# Altium PCB PCB1.PcbDoc
Units mm, origin at the board's own origin, x right, y up, seen from the top; angles counter-clockwise.
Board outline 146.68 x 134.47 mm, 2 copper layers (Top Layer, Bottom Layer); 96 components, 78 nets, 282 pads, 85 vias.
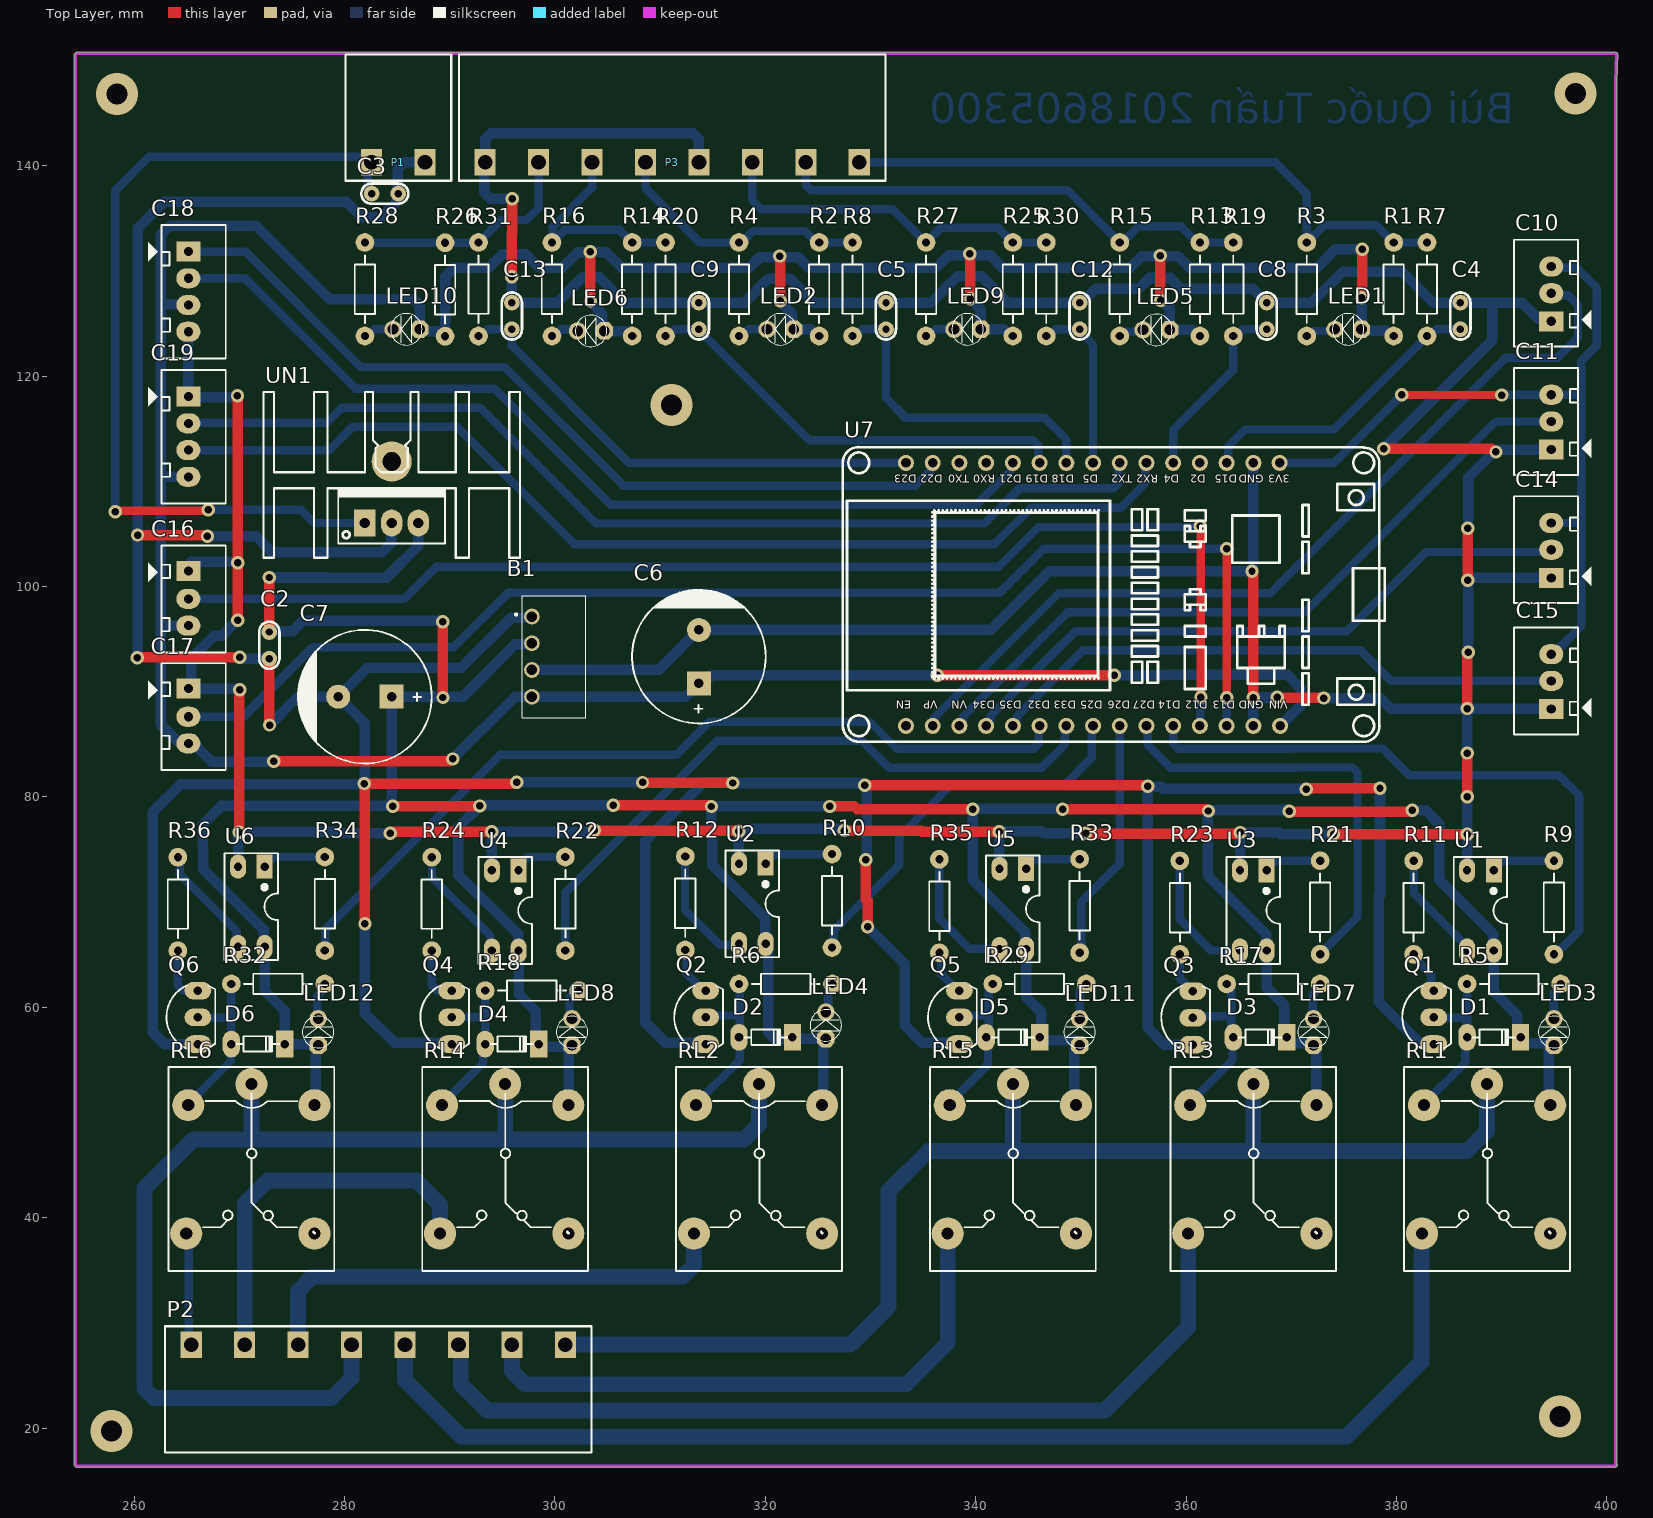
[diagram p0: Top Layer view]
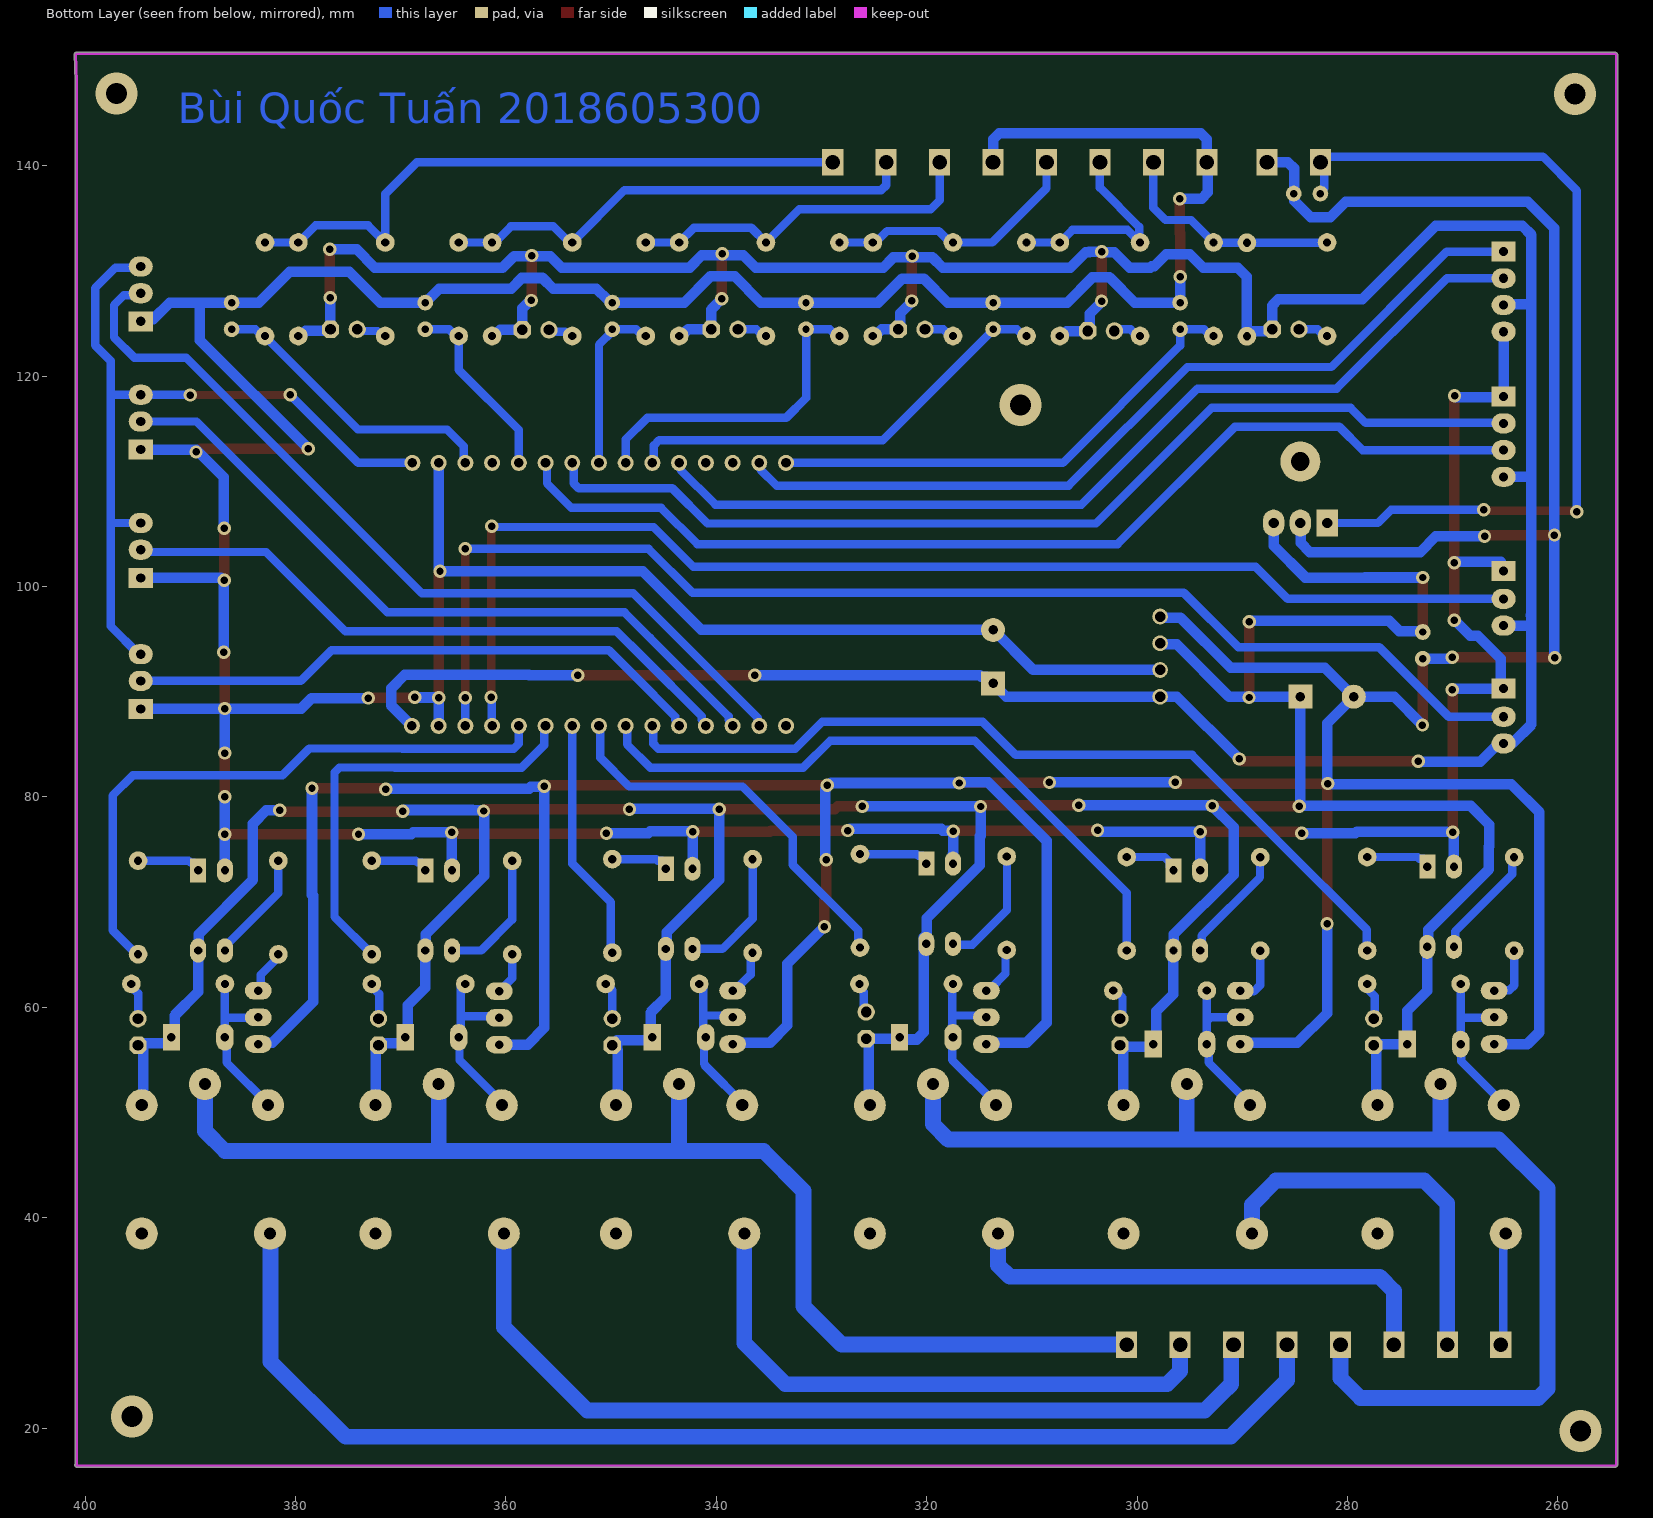
[diagram p1: Bottom Layer view, seen from below]

## Layer stack, top to bottom
Top Solder: solder mask 0.0102, Solder Resist, Dk 3.5
Top Layer: signal copper 0.0356
Dielectric 1: dielectric 0.32, FR-4, Dk 4.8
Bottom Layer: signal copper 0.0356
Bottom Solder: solder mask 0.0102, Solder Resist, Dk 3.5

## Board outline
254.368,16.394 254.418,16.344 ccw(c254.508,16.433) 254.508,16.306 400.812,16.306 ccw(c400.812,16.434) 400.903,16.344 400.953,16.395 ccw(c400.863,16.485) 400.99,16.485 ccw(c400.863,16.485) 400.939,16.586 400.939,35.103 400.939,148.004 401.014,150.644 ccw(c400.884,150.645) 400.886,150.775 254.508,150.775 ccw(c254.508,150.647) 254.417,150.737 254.367,150.687 ccw(c254.456,150.597) 254.33,150.597 254.33,16.485 ccw(c254.457,16.485)

## Design rules (kind name [scope] priority, off if disabled: settings)
Clearance [All] p1: gap=1 ignorepadtopadclearanceinfootprint=FALSE
PolygonConnect [All] p1: connectstyle=Relief reliefconductorwidth=0.254 reliefentries=4 polygonreliefangle="90 Angle" airgapwidth=0.254
RoutingVias [All] p1: holewidth=0.711 width=1.27 viastyle="Through Hole" minholewidth=0.711 minwidth=1.27 maxholewidth=0.711 maxwidth=1.27
SolderMaskExpansion [All] p1: expansion=0.102 istentingtop=FALSE
Width GND_ISO [InNet('GND_ISO')] p1: maxlimit=1 minlimit=1 preferedwidth=1
Width COM_O_1 [InNet('COM_O_1')] p2: maxlimit=1.5 minlimit=1.5 preferedwidth=1.5
Width COM_O_2 [InNet('COM_O_2')] p3: maxlimit=1.5 minlimit=1.5 preferedwidth=1.5
Width VCC_ISO [InNet('VCC5_ISO')] p4: maxlimit=1 minlimit=1 preferedwidth=1
Width GND [InNet('GND')] p5: maxlimit=1 minlimit=1 preferedwidth=1
Width VCC [InNet('VCC5')] p6: maxlimit=1 minlimit=1 preferedwidth=1
Width SIGNAL [All] p7: maxlimit=0.8 minlimit=0.8 preferedwidth=0.8
30 further rules are at their usual default settings.

## Components (designator, comment, footprint, x,y, rotation, side; value= is the part's Value field where it differs from the comment)
B1 "B0505S1W" B0505S1W 297.815,97.155 r270 top
C2 "104" "tu gom" 272.847,94.412 r270 top
C3 "104" "tu gom" 283.845,137.363 r0 top
C4 "104" "tu gom" 386.08,125.73 r90 top
C5 "104" "tu gom" 331.47,125.73 r90 top
C6 "Cap Pol3" CP2/5 313.69,90.805 r90 top value=C?
C7 "Cap Pol3" CP2/5 284.48,89.535 r180 top value=C?
C8 "104" "tu gom" 367.665,125.73 r90 top
C9 "104" "tu gom" 313.69,125.73 r90 top
C10 "ADC1" Header3 394.716,125.349 r90 top
C11 "ADC2" Header3 394.716,113.157 r90 top
C12 "104" "tu gom" 349.885,125.73 r90 top
C13 "104" "tu gom" 295.91,125.73 r90 top
C14 "ADC3" Header3 394.716,100.965 r90 top
C15 "ADC4" Header3 394.716,88.494 r90 top
C16 "1_WIRE_1" Header3 265.151,101.371 r270 top
C17 "1_WIRE_2" Header3 265.151,90.17 r270 top
C18 "LCD_I2C" Header4 265.151,131.851 r270 top
C19 "UART2" Header4 265.151,118.059 r270 top
D1 "100v" "DIODE 0.5A" 389.255,57.15 r180 top
D2 "100v" "DIODE 0.5A" 320.04,57.15 r180 top
D3 "100v" "DIODE 0.5A" 367.03,57.15 r180 top
D4 "100v" "DIODE 0.5A" 295.91,56.515 r180 top
D5 "100v" "DIODE 0.5A" 343.535,57.15 r180 top
D6 "100v" "DIODE 0.5A" 271.78,56.515 r180 top
LED1 "LED 3mm" LED-3MM-BLUE 375.285,124.46 r180 top
LED2 "LED 3mm" LED-3MM-BLUE 321.31,124.46 r180 top
LED3 "LED 3mm" LED-3MM-BLUE 394.97,57.785 r90 top
LED4 "LED 3mm" LED-3MM-BLUE 325.755,58.42 r90 top
LED5 "LED 3mm" LED-3MM-BLUE 357.048,124.409 r180 top
LED6 "LED 3mm" LED-3MM-BLUE 303.301,124.308 r180 top
LED7 "LED 3mm" LED-3MM-BLUE 372.11,57.785 r90 top
LED8 "LED 3mm" LED-3MM-BLUE 301.625,57.785 r90 top
LED9 "LED 3mm" LED-3MM-BLUE 339.09,124.46 r180 top
LED10 "LED 3mm" LED-3MM-BLUE 285.75,124.46 r180 top
LED11 "LED 3mm" LED-3MM-BLUE 349.885,57.785 r90 top
LED12 "LED 3mm" LED-3MM-BLUE 277.495,57.785 r90 top
P1 "BIG_Header 2" "BIG_Header 2" 282.575,140.335 r0 top
P2 "BIG Heager 8" "BIG_Header 8" 300.99,27.94 r180 top
P3 "BIG Heager 8" "BIG_Header 8" 293.37,140.335 r0 top
Q1 "C1815" C1815_cam 383.54,59.055 r90 top
Q2 "C1815" C1815_cam 314.325,59.055 r90 top
Q3 "C1815" C1815_cam 360.629,59.004 r90 top
Q4 "C1815" C1815_cam 290.195,59.055 r90 top
Q5 "C1815" C1815_cam 338.455,59.055 r90 top
Q6 "C1815" C1815_cam 266.065,59.055 r90 top
R1 "10K" R1/4W 379.73,132.715 r270 top value="R1/4W - 1K"
R2 "10K" R1/4W 325.12,132.715 r270 top value="R1/4W - 1K"
R3 "220R" R1/4W 371.475,132.715 r270 top value="R1/4W - 1K"
R4 "220R" R1/4W 317.5,132.715 r270 top value="R1/4W - 1K"
R5 "510R" R1/4W 395.605,62.23 r180 top value="R1/4W - 1K"
R6 "510R" R1/4W 326.39,62.23 r180 top value="R1/4W - 1K"
R7 "1K" R1/4W 382.905,123.825 r90 top value="R1/4W - 1K"
R8 "1K" R1/4W 328.295,123.825 r90 top value="R1/4W - 1K"
R9 "100R" R1/4W 394.97,65.055 r90 top value="R1/4W - 1K"
R10 "100R" R1/4W 326.339,65.687 r90 top value="R1/4W - 1K"
R11 "510R" R1/4W 381.635,73.929 r270 top value="R1/4W - 1K"
R12 "510R" R1/4W 312.395,74.346 r270 top value="R1/4W - 1K"
R13 "10K" R1/4W 361.315,132.715 r270 top value="R1/4W - 1K"
R14 "10K" R1/4W 307.34,132.715 r270 top value="R1/4W - 1K"
R15 "220R" R1/4W 353.695,132.715 r270 top value="R1/4W - 1K"
R16 "220R" R1/4W 299.72,132.715 r270 top value="R1/4W - 1K"
R17 "510R" R1/4W 372.745,62.23 r180 top value="R1/4W - 1K"
R18 "510R" R1/4W 302.26,61.595 r180 top value="R1/4W - 1K"
R19 "1K" R1/4W 364.49,123.825 r90 top value="R1/4W - 1K"
R20 "1K" R1/4W 310.515,123.825 r90 top value="R1/4W - 1K"
R21 "100R" R1/4W 372.745,65.055 r90 top value="R1/4W - 1K"
R22 "100R" R1/4W 300.99,65.405 r90 top value="R1/4W - 1K"
R23 "510R" R1/4W 359.41,73.929 r270 top value="R1/4W - 1K"
R24 "510R" R1/4W 288.29,74.28 r270 top value="R1/4W - 1K"
R25 "10K" R1/4W 343.535,132.715 r270 top value="R1/4W - 1K"
R26 "10K" R1/4W 289.56,132.691 r270 top value="R1/4W - 1K"
R27 "220R" R1/4W 335.28,132.715 r270 top value="R1/4W - 1K"
R28 "220R" R1/4W 281.94,132.715 r270 top value="R1/4W - 1K"
R29 "510R" R1/4W 350.52,62.23 r180 top value="R1/4W - 1K"
R30 "1K" R1/4W 346.71,123.825 r90 top value="R1/4W - 1K"
R31 "1K" R1/4W 292.735,123.825 r90 top value="R1/4W - 1K"
R32 "510R" R1/4W 278.13,62.23 r180 top value="R1/4W - 1K"
R33 "100R" R1/4W 349.885,65.205 r90 top value="R1/4W - 1K"
R34 "100R" R1/4W 278.13,65.405 r90 top value="R1/4W - 1K"
R35 "510R" R1/4W 336.55,74.079 r270 top value="R1/4W - 1K"
R36 "510R" R1/4W 264.16,74.28 r270 top value="R1/4W - 1K"
RL1 "Relay" RELAY_SRA_05VDC_SL_C 388.62,52.705 r270 top
RL2 "Relay" RELAY_SRA_05VDC_SL_C 319.405,52.705 r270 top
RL3 "Relay" RELAY_SRA_05VDC_SL_C 366.395,52.705 r270 top
RL4 "Relay" RELAY_SRA_05VDC_SL_C 295.275,52.705 r270 top
RL5 "Relay" RELAY_SRA_05VDC_SL_C 343.535,52.705 r270 top
RL6 "Relay" RELAY_SRA_05VDC_SL_C 271.145,52.705 r270 top
U1 "PC817" DIP4/W0.3 389.255,73.028 r180 top
U2 "PC817" DIP4/W0.3 320.04,73.66 r180 top
U3 "PC817" DIP4/W0.3 367.665,73.028 r180 top
U4 "PC817" DIP4/W0.3 296.545,73.025 r180 top
U5 "PC817" DIP4/W0.3 344.805,73.178 r180 top
U6 "PC817" DIP4/W0.3 272.415,73.378 r180 top
U7 "ESP32_MODULE copy" ESP32-WIFIMODULE-FOOTPRINT 352.889,101.388 r90 top
UN1 "L78M05CP" QTO-220H2 284.48,106.045 r0 top

## Footprints (in the part's own frame and the unit in brackets; to place one, negate y for a bottom-side part, rotate by r counter-clockwise, add the part's x,y. Pads: shape width x height; smd on the part's side, far side on the other; paste and mask are expansions set on the pad)
B0505S1W [mm]
  round 1.5 hole 1: 1(0,0) 2(2.54,0) 3(5.08,0) 4(7.62,0)
  silkscreen extent -1.99,-1.6 9.61,5.1, body extent -1.99,-0.9 9.61,5.1, height 10.1
"BIG_Header 2" [mm]
  rect 2x2.5 hole 1.4: 1(0,0) 2(5.08,0)
  silkscreen extent -2.5,-1.75 7.57,10.25, body extent -2.5,-1.75 7.58,10.25, height 3.15
"BIG_Header 8" [mm]
  rect 2x2.5 hole 1.4: 1(0,0) 2(5.08,0) 3(10.16,0) 4(15.24,0) 5(20.32,0) 6(25.4,0) 7(30.48,0) 8(35.56,0)
  silkscreen extent -2.5,-1.75 38.06,10.25, body extent -2.5,-1.75 38.06,10.25, height 3.15
C1815_cam [mil]
  oval 66x100 hole 32: 1(-100,0) 2(0,0) 3(100,0)
  silkscreen extent -117,-65 120,118, body extent -109,-66 109,95, height 245
CP2/5 [mil]
  rect 90x90 hole 35: 1(0,0)
  round 90 hole 35: 2(200,0)
  silkscreen extent -150,-250 350,250, body extent -142,-246 350,246, height 984
"DIODE 0.5A" [mil] "Diode muoi, xung"
  oval 65x100 hole 32: 1(100,0)
  rect 65x100 hole 32: 2(-100,0)
  silkscreen extent -80,-30 80,28, body extent -108,-33 108,32, height 61
DIP4/W0.3 [mil]
  rect 60x90 hole 31: 1(0,0)
  oval 60x90 hole 31: 2(100,0) 3(100,300) 4(0,300)
  silkscreen extent -50,-50 150,350, body extent -59,-10 159,305, height 170
ESP32-WIFIMODULE-FOOTPRINT [mil]
  round 60 hole 36: 1(-575.9,768.25) 2(-575.9,668.25) 3(-575.9,568.25) 4(-575.9,468.25) 5(-575.9,368.25) 6(-575.9,268.25) 7(-575.9,168.25) 8(-575.9,68.25) 9(-575.9,-31.75) 10(-575.9,-131.75) 11(-575.9,-231.75) 12(-575.9,-331.75) 13(-575.9,-431.75) 14(-575.9,-531.75) 15(-575.9,-631.75) 16(408.35,-630.18) 17(408.35,-531.75) 18(408.35,-431.75) 19(408.35,-331.75) 20(408.35,-231.75) 21(408.35,-131.75) 22(408.35,-31.75) 23(408.35,68.25) 24(408.35,168.25) 25(408.35,268.25) 26(408.35,368.25) 27(408.35,468.25) 28(408.35,568.25) 29(408.35,668.25) 30(408.35,768.25)
  silkscreen extent -635,-1023 468,1005
Header3 [mil] "CON 3"
  rect 75x90 hole 34: 1(-5,0)
  oval 75x90 hole 34: 2(100,0) 3(200,0)
  silkscreen extent -100,-150 300,140, body extent -95,-90 295,136, height 276
Header4 [mil] "CON4"
  rect 75x90 hole 34: 1(0,0)
  oval 75x90 hole 34: 2(100,0) 3(200,0) 4(300,0)
  silkscreen extent -100,-150 400,140, body extent -90,-90 398,136, height 276
LED-3MM-BLUE [mil]
  oct 65x65 hole 40: 1(-55,0)
  round 65 hole 40: 2(45,0)
  silkscreen extent -64,-59 54,59, body extent -72,-65 54,65, height 184
QTO-220H2 [mil] "TO-220 - 1-2-3"
  round 150 hole 70: 0(0,230)
  rect 80x100 hole 39: 1(-100,0)
  oval 80x100 hole 39: 2(0,0) 3(100,0)
  silkscreen extent -480,-130 480,490, body extent -449,-177 453,469, height 1206
R1/4W [mil]
  round 70 hole 31: 1(0,0) 2(350,0)
  silkscreen extent 48,-38 302,38, body extent -40,-47 386,47, height 111
RELAY_SRA_05VDC_SL_C [mil] "Relay SPDT, 5 pin, 10A,W 650mil, L 800mil, H 800mil"
  round 120 hole 45: 1(559.06,-243.78) 2(559.06,236.22) 3(78.74,236.22) 4(0,0) 5(78.74,-236.22)
  silkscreen extent -63,-311 700,310, body extent -55,-306 697,304, height 602
"tu gom" [mm] "Tu gom mini"
  round 1.5 hole 0.7: 1(-1.27,0) 2(1.27,0)
  silkscreen extent -2.25,-0.97 2.22,0.97, body extent -2.92,-0.85 2.92,0.85, height 6.12

## Part data
B1: "Power Supply", Manufacturer_Name=Mornsun, Manufacturer_Part_Number=B0505S-1W, Datasheet Link=https://www.mornsun-power.com/uploads/pdf/B_D-1W.pdf, Height=10.41mm
C2 C3 C4 C5 C8 C9 C12 C13: library part "Tu gom 104 50V", "Cắm", Chung_Loai=Cắm, Don_Vi=Con, Ma_Hang=MH004761, So_Chan=2, Ten_Linh_Kien="Tụ gốm 104 100nF 50V"
C6 C7: "Polarized Capacitor (Surface Mount)", LatestRevisionDate=17-Jul-2002, LatestRevisionNote="Re-released for DXP Platform.", PackageReference=C0805, Publisher="Altium Limited"
C10 C11 C14 C15 C16 C17: library part Header3, "Header IDC, 3 x 1 Pin Vertical 2.54mm Pitch (Non-Boxed, Male)", Manufacturer="W¨¹rth Elektronik eiSos GmbH", partNo=613002143121, ComponentLink1 Description=Manufacturer, ComponentLink1URL=http://www.we-online.com, ComponentLink2 Description=Datasheet, ComponentLink2URL=http://katalog.we-online.de/em/datasheet/6130xx143121.pdf, Created by="Karrer Zheng", Created Date="29 March 2013", NoPins=02
C18 C19: library part Header4, "Header IDC, 4 x 1 Pin Vertical 2.54mm Pitch (Non-Boxed, Male)", Manufacturer="W¨¹rth Elektronik eiSos GmbH", partNo=613002143121, ComponentLink1 Description=Manufacturer, ComponentLink1URL=http://www.we-online.com, ComponentLink2 Description=Datasheet, ComponentLink2URL=http://katalog.we-online.de/em/datasheet/6130xx143121.pdf, Created by="Karrer Zheng", Created Date="29 March 2013", NoPins=02
D1 D2 D3 D4 D5 D6: library part "Diode 1N4148", "Cắm", Chung_Loai=Cắm, Don_Vi=Con, Ma_Hang=MH001065, Ten_Linh_Kien="Diode 1N4148 DO35 450mA 100V ( 1N4148 DIP)"
LED1 LED2 LED3 LED4 LED5 LED6 LED7 LED8 LED9 LED10 LED11 LED12: library part "LED 3mm Xanh Duong", "Cắm", Chung_Loai=Cắm, Don_Vi=Con, Ma_Hang=MH009003, Ten_Linh_Kien="LED 3MM Xanh Dương SS (1000c)"
P2 P3: library part "BIG_Header 8"
Q1 Q2 Q3 Q4 Q5 Q6: "NPN 600mW, ECB"
R1 R2 R3 R4 R5 R6 R7 R8 R9 R10 R11 R12 R13 R14 R15 R16 R17 R18 R19 R20 R21 R22 R23 R24 R25 R26 R27 R28 R29 R30 R31 R32 R33 R34 R35 R36: library part R1/4W, "Resistor 1/4W"
RL1 RL2 RL3 RL4 RL5 RL6: library part RL_SRA-05VDC-SL-C, "Relay 5 Chan", Ma_Hang=MH009374, Ten="Relay 5V10A SRD-05VDC-SL-C Chính Hãng"
U1 U2 U3 U4 U5 U6: "Single Opto"
UN1: "Positive Voltage Regulator", ComponentLink1Description="Manufacturer Link", ComponentLink1URL=http://www.st.com/, ComponentLink2Description=Datasheet, ComponentLink2URL=http://www.st.com/stonline/products/literature/ds/2146/l78m05c.pdf, DatasheetVersion=Apr-1994, LatestRevisionDate=17-Jul-2002, LatestRevisionNote="Re-released for DXP Platform.", Note="Tab is connected to pin 3 (GND).", PackageDescription="TO, Thru-Hole, Vertical, Heatsink Mounted; 3 In-Line Leads; Pitch 2.54 mm; Pin sequence 1, 3, 2", PackageReference=ISOWATT220AB, PackageVersion=Jul-1998, Published=24-Aug-2001, Publisher="Altium Limited"

## Via types
v1: diameter 1.27, hole 0.711, Top Layer to Bottom Layer, 80 vias
v2: diameter 4, hole 2, Top Layer to Bottom Layer, 5 vias

## Nets (pads, with @x,y where several pads share a name; then routed paths per layer and width w, separated by ;. In a path a pad name is that pad's centre, name@x,y a point inside that pad or via, vN(x,y) a via of type N, cw(c..) or ccw(c..) an arc to the next point about the centre after c; other vN are vias at no path point)
1_WIRE_1: C17.2 U7.13 | length 122
  Top Layer w0.8: U7.13 U7.13@363.918,86.823 ; v1(363.855,89.433) v1(363.855,103.608)
  Bottom Layer w0.8: C17.2@265.43,87.63 270.376,87.63 276.98,94.234 290.378,94.234 295.56,99.416 342.262,99.416 346.431,103.585 361.603,103.585 361.627,103.608 v1(363.855,103.608) ; U7.13 v1(363.855,89.433)
1_WIRE_2: C16.2 U7.12 | length 118.2
  Top Layer w0.8: U7.12 U7.12@361.378,86.823 ; v1(361.34,105.74) 361.378,105.702 361.378,89.522 v1(361.417,89.484)
  Bottom Layer w0.8: C16.2 285.674,98.831 288.722,101.879 342.18,101.879 345.965,105.664 361.264,105.664 v1(361.34,105.74) ; U7.12 361.366,86.811 361.366,89.433 v1(361.417,89.484)
ADC1_0: C10.2 U7.2 | length 83.1
  Bottom Layer w0.8: U7.2 336.054,86.899 336.054,87.515 347.89,99.351 367.981,99.351 390.398,121.768 395.337,121.768 397.259,123.69 397.259,126.754 396.336,127.678 394.927,127.678 C10.2
ADC1_3: C11.2 U7.3 | length 68.6
  Bottom Layer w0.8: U7.3 338.455,86.956 338.833,87.334 338.833,87.667 346.296,95.13 348.717,97.551 371.267,97.551 389.413,115.697 C11.2
ADC1_6: C14.2 U7.4 | length 61
  Bottom Layer w0.8: U7.4 340.995,86.956 341.373,87.334 341.373,87.661 347.042,93.33 349.463,95.751 375.253,95.751 382.795,103.294 394.505,103.294 C14.2
ADC1_7: C15.2 U7.5 | length 55.8
  Bottom Layer w0.8: U7.5 343.535,86.956 343.913,87.334 343.913,87.656 347.787,91.53 350.208,93.951 376.584,93.951 379.501,91.034 C15.2@394.843,91.034
COM_O_1: P2.1 RL1.4 RL3.4 RL5.4 | length 119.6
  Bottom Layer w1.5: P2.1 328.066,27.94 331.724,31.598 331.724,42.57 335.509,46.355 343.535,46.355 ; RL5.4 343.535,46.355 ; RL3.4 366.395,46.355 ; RL1.4 388.62,48.26 386.715,46.355 366.395,46.355 ; 343.535,46.355 366.395,46.355
COM_O_2: P2.5 RL2.4 RL4.4 RL6.4 | length 118.4
  Bottom Layer w1.5: RL6.4 271.145,47.431 ; P2.5 280.67,24.765 278.765,22.86 261.864,22.86 260.985,23.739 260.985,42.799 265.617,47.431 271.145,47.431 ; RL4.4 295.275,47.431 ; RL2.4 319.405,48.895 317.941,47.431 295.275,47.431 ; 271.145,47.431 295.275,47.431
GND: B1.1 C2.2 C3.2 C7.2 P1.2 Q1.1 Q2.1 Q3.1 Q4.1 Q5.1 Q6.1 UN1.2 | length 452.6
  Top Layer w1: v1(260.299,93.243) 260.325,93.269 270.027,93.269 v1(270.053,93.294) ; v1(260.325,104.902) 266.771,104.902 266.898,104.775 v1(266.971,104.775) ; C2.2 272.847,86.868 v1(272.872,86.843) ; v1(281.94,67.945) 281.914,67.971 281.914,81.254 v1(281.888,81.28) 296.212,81.28 296.316,81.385 v1(296.389,81.385) ; v1(308.331,81.382) 308.356,81.356 316.89,81.356 v1(316.916,81.331) ; v1(329.463,81.128) 356.179,81.128 356.281,81.026 v1(356.354,81.026) ; v1(329.565,74.041) 329.565,70.297 329.721,70.14 v1(329.721,67.662) ; v1(371.422,80.744) 371.474,80.795 371.665,80.795 371.718,80.848 v1(378.435,80.848)
  Bottom Layer w1: v1(260.299,93.243) 260.325,93.269 v1(260.325,104.902) 260.325,134.071 262.855,136.601 280.151,136.601 281.639,135.113 283.507,135.113 285.075,136.681 285.075,139.749 285.661,140.335 P1.2 ; Q6.1 262.89,56.515 261.747,57.658 261.747,78.562 264.414,81.229 281.838,81.229 v1(281.888,81.28) ; v1(266.971,104.775) 271.596,104.775 273.096,103.275 283.577,103.275 284.456,104.154 284.456,106.021 UN1.2 ; v1(270.053,93.294) 270.126,93.294 270.278,93.142 C2.2 ; v1(272.872,86.843) 275.565,89.535 C7.2 ; v1@281.837,81.28 281.915,81.358 281.915,87.02 C7.2 ; v1(281.94,67.945) 281.94,59.461 284.757,56.644 290.066,56.644 Q4.1 ; v1(296.389,81.385) v1(296.389,81.385) 308.329,81.383 v1(308.331,81.382) ; B1.1 297.719,97.059 295.891,97.059 291.109,92.278 282.143,92.278 C7.2 ; Q2.1 314.196,56.644 310.513,56.644 308.61,58.547 308.61,75.841 314.15,81.382 316.865,81.382 v1(316.916,81.331) v1@329.065,81.331 ; v1(329.565,74.041) 329.565,74.114 329.651,74.2 v1@329.651,80.745 ; v1(329.721,67.662) 333.248,64.135 333.248,58.293 334.897,56.644 338.326,56.644 Q5.1 ; Q3.1 357.937,56.464 356.354,58.047 v1(356.354,81.026) 356.406,80.974 357.635,80.974 357.805,80.804 363.969,80.804 363.996,80.777 371.389,80.777 v1(371.422,80.744) ; v1(378.435,80.848) 378.435,70.7 378.333,70.599 378.333,60.523 382.212,56.644 383.541,56.644 Q1.1@383.576,56.609
GND_ISO: B1.3 C4.2 C5.2 C6.2 C8.2 C9.2 C10.1 C11.1 C12.2 C13.2 C14.1 C15.1 C16.1 C17.1 C18.4 C19.1 P3.1 P3.5 U1.2 U2.2 U3.2 U4.2 U5.2 U6.2 U7.14 U7.17 | length 555.8
  Top Layer w1: v1(269.824,118.135) 269.838,118.121 v1(269.838,102.26) 269.844,102.255 269.844,96.802 v1(269.85,96.796) ; v1(270.002,76.637) 270.015,76.65 270.015,90.183 v1(270.027,90.195) ; v1(284.353,76.556) 284.426,76.556 284.578,76.708 v1(294.005,76.708) ; v1(295.913,129.47) 295.913,133.582 295.935,133.604 v1(295.935,136.884) ; v1(303.757,76.834) 303.807,76.784 317.463,76.784 v1(317.489,76.759) ; v1(327.516,76.81) 334.801,76.81 334.928,76.683 v1(342.24,76.683) ; v1(350.444,76.556) 350.493,76.507 364.96,76.507 365.081,76.628 v1(365.154,76.628) ; v1(366.268,101.475) 366.268,101.402 366.395,101.275 v1(366.395,89.432) ; v1(368.684,89.484) 368.722,89.446 373.037,89.446 v1(373.075,89.408) ; v1(374.015,76.454) v1(386.715,76.454) ; v1(378.79,113.115) 389.072,113.115 389.385,112.801 v1(389.458,112.801) ; v1(386.715,88.409) 386.715,93.602 386.817,93.704 v1(386.817,93.777) ; v1(386.74,80.029) v1(386.74,84.176) ; v1(386.791,100.609) v1(386.791,105.562)
  Bottom Layer w1: C18.4 C19.1 265.189,118.021 269.637,118.021 269.751,118.135 v1(269.824,118.135) ; C16.1@265.43,102.362 269.664,102.362 269.765,102.26 v1(269.838,102.26) ; v1(269.85,96.796) 269.792,96.796 268.311,95.316 267.604,95.316 265.43,93.142 265.43,90.297 269.926,90.297 v1(270.027,90.195) ; U6.2@269.875,73.66 269.875,76.437 270.002,76.564 v1(270.002,76.637) ; v1@270.601,76.708 279.096,76.708 279.248,76.556 v1(284.353,76.556) ; U4.2 v1(294.005,76.708) 303.559,76.708 303.684,76.834 v1(303.757,76.834) ; v1(295.913,129.47) 295.91,129.467 C13.2 300.212,127 302.625,129.413 304.241,129.413 306.654,127 C9.2 317.992,127 320.279,129.287 322.341,129.287 324.628,127 C5.2 335.772,127 338.263,129.491 340.552,129.491 343.043,127 C12.2 350.02,127 C12.2@350.116,127.096 ; v1(295.935,136.884) 293.854,136.884 293.268,137.469 293.268,140.233 P3.1 293.37,142.518 293.956,143.104 313.104,143.104 313.69,142.518 P3.5 ; B1.3 309.88,92.075 C6.2 341.418,95.885 347.006,101.473 366.266,101.473 v1(366.268,101.475) 366.268,101.548 366.395,101.675 U7.17 ; U2.2@317.5,74.562 317.489,74.573 v1(317.489,76.759) 317.541,76.81 318.472,76.81 318.628,76.966 327.287,76.966 327.442,76.81 v1(327.516,76.81) ; U5.2 342.252,73.19 342.252,76.67 v1(342.24,76.683) 342.289,76.732 346.28,76.732 346.456,76.556 v1(350.444,76.556) ; C12.2@350.338,127.25 351.414,128.326 355.513,128.326 356.524,129.337 358.486,129.337 359.497,128.326 366.339,128.326 C8.2 371.967,127 374.887,129.92 380.57,129.92 383.489,127 C4.2 389.103,127 ; U3.2 365.14,73.042 365.14,76.613 v1(365.154,76.628) 368.819,76.628 368.993,76.454 v1(374.015,76.454) ; U7.14 v1(366.395,89.432) 366.421,89.458 368.658,89.458 v1(368.684,89.484) ; v1(373.075,89.408) 378.44,89.408 379.439,88.409 v1(386.715,88.409) ; v1(378.79,113.115) 378.79,113.126 389.103,123.439 389.103,127 ; U1.2@386.715,73.66 v1(386.715,76.454) 386.728,76.467 386.728,80.017 v1(386.74,80.029) ; v1(386.74,84.176) 386.715,84.201 v1(386.715,88.409) ; v1(386.791,105.562) 386.817,105.588 386.817,110.414 v1@389.331,112.928 ; v1(386.817,93.777) 386.804,93.789 386.804,100.597 v1(386.791,100.609) 386.864,100.609 387.093,100.838 C14.1 ; v1@389.458,113.03 C11.1 ; C15.1 394.695,88.388 386.736,88.388 v1(386.715,88.409) ; C10.1 394.502,125.436 393.51,125.436 391.946,127 389.103,127
IN_1: C4.1 R7.1 U7.18 | length 28.4
  Bottom Layer w0.8: U7.18 363.994,111.899 363.994,113.335 365.594,114.935 374.077,114.935 382.905,123.763 R7.1 383.17,123.825 383.805,124.46 C4.1
IN_2: C8.1 R19.1 U7.20 | length 17.9
  Bottom Layer w0.8: U7.20 358.775,114.901 364.49,120.616 R19.1 364.755,123.825 365.39,124.46 C8.1
IN_3: C12.1 R30.1 U7.23 | length 16.7
  Bottom Layer w0.8: R30.1 346.975,123.825 347.61,124.46 C12.1 349.885,124.271 351.155,123.001 U7.23
IN_4: C5.1 R8.1 U7.24 | length 31
  Bottom Layer w0.8: R8.1 328.56,123.825 329.195,124.46 C5.1 331.47,117.932 333.35,116.053 346.558,116.053 348.615,113.995 U7.24
IN_5: C9.1 R20.1 U7.25 | length 42
  Bottom Layer w0.8: R20.1 310.78,123.825 311.415,124.46 C9.1 313.69,124.398 324.194,113.894 332.451,113.894 332.479,113.922 345.439,113.922 345.936,113.425 345.936,111.899 U7.25
IN_6: C13.1 R31.1 U7.30 | length 47.1
  Bottom Layer w0.8: R31.1 293,123.825 293.635,124.46 C13.1 295.91,122.911 307.061,111.76 U7.30
NetC3_1: C3.1 P1.1 UN1.1 | length 83.9
  Top Layer w0.8: v1(258.19,107.113) 258.278,107.201 266.959,107.201 v1(267.048,107.29)
  Bottom Layer w0.8: v1(258.19,107.113) 258.19,137.634 261.427,140.872 282.225,140.872 282.225,137.885 282.575,137.535 C3.1 ; v1(267.048,107.29) 275.866,107.29 277.111,106.045 UN1.1
NetD1_1: D1.1 Q1.2 R5.2 RL1.5 | length 16.6
  Bottom Layer w0.8: RL1.5@382.479,50.534 382.479,50.699 386.552,54.772 D1.1@386.552,57.15 ; Q1.2 383.565,59.03 386.715,59.03 ; D1.1 386.715,59.03 ; R5.2 386.715,59.03
NetD2_1: D2.1 Q2.2 R6.2 RL2.5 | length 16.4
  Bottom Layer w0.8: RL2.5@313.509,50.754 313.509,50.944 317.576,55.011 317.576,59.411 ; Q2.2@314.39,59.225 317.39,59.225 317.576,59.411 ; R6.2@317.576,62.205 317.576,59.411
NetD3_1: D3.1 Q3.2 R17.2 RL3.5 | length 17.2
  Bottom Layer w0.8: RL3.5@359.963,50.398 359.963,50.534 364.414,54.984 364.414,57.04 364.286,57.169 364.286,59.106 ; Q3.2@361.06,59.149 364.243,59.149 364.286,59.106 ; R17.2@364.157,62.362 364.286,62.233 364.286,59.106
NetD4_1: D4.1 Q4.2 R18.2 RL4.5 | length 16
  Bottom Layer w0.8: RL4.5@289.077,50.534 289.077,50.643 293.207,54.772 293.207,56.602 D4.1@293.116,56.693 ; Q4.2 293.13,59.055 293.13,58.928 ; D4.1 R18.2
NetD5_1: D5.1 Q5.2 R29.2 RL5.5 | length 16.6
  Bottom Layer w0.8: RL5.5@337.236,50.5 337.236,50.635 341.097,54.496 341.097,54.588 341.173,54.664 341.173,57.117 341.249,57.193 341.249,59.284 ; Q5.2@338.333,59.225 341.19,59.225 341.249,59.284 ; R29.2@341.325,62.463 341.249,62.387 341.249,59.284
NetD6_1: D6.1 Q6.2 R32.2 RL6.5 | length 16.3
  Bottom Layer w0.8: RL6.5@265.107,50.802 269.175,54.871 269.175,56.45 D6.1 269.24,59.03 ; Q6.2 266.09,59.03 269.24,59.03 ; R32.2 269.24,59.03
NetLED1_2: LED1.2 R3.2 | length 2.9
  Bottom Layer w0.8: R3.2 371.74,123.825 372.212,124.297 373.979,124.297 LED1.2
NetLED2_2: LED2.2 R4.2 | length 2.9
  Bottom Layer w0.8: R4.2 317.765,123.825 318.4,124.46 LED2.2
NetLED3_2: LED3.2 R5.1 | length 3.6
  Bottom Layer w0.8: LED3.2 394.97,61.33 395.605,61.965 R5.1
NetLED4_2: LED4.2 R6.1 | length 3
  Bottom Layer w0.8: LED4.2@325.822,59.487 325.985,59.65 325.985,61.459 326.466,61.94 R6.1@326.466,62.205
NetLED5_2: LED5.2 R15.2 | length 2.5
  Bottom Layer w0.8: R15.2 353.96,123.825 354.381,124.246 355.742,124.246 LED5.2
NetLED6_2: LED6.2 R16.2 | length 2.7
  Bottom Layer w0.8: R16.2 299.985,123.825 300.62,124.46 LED6.2@302.157,124.46
NetLED7_2: LED7.2 R17.1 | length 3.6
  Bottom Layer w0.8: LED7.2 372.059,58.979 372.059,61.28 372.745,61.965 R17.1
NetLED8_2: LED8.2 R18.1 | length 3.3
  Bottom Layer w0.8: LED8.2@301.39,58.788 301.39,60.94 302.034,61.584 R18.1@302.034,61.849
NetLED9_2: LED9.2 R27.2 | length 2.9
  Bottom Layer w0.8: R27.2 335.545,123.825 336.18,124.46 LED9.2
NetLED10_2: LED10.2 R28.2 | length 2.9
  Bottom Layer w0.8: R28.2 282.205,123.825 282.84,124.46 LED10.2
NetLED11_2: LED11.2 R29.1 | length 3.5
  Bottom Layer w0.8: LED11.2 349.885,61.633 350.333,62.081 R29.1@350.215,62.199
NetLED12_2: LED12.2 R32.1 | length 3.3
  Bottom Layer w0.8: LED12.2@277.42,58.915 277.42,61.067 278.064,61.711 R32.1@278.064,61.976
NetQ1_3: Q1.3 R11.2 | length 4.2
  Bottom Layer w0.8: R11.2 381.635,64.775 383.32,63.089 383.32,61.815 Q1.3
NetQ2_3: Q2.3 R12.2 | length 4.7
  Bottom Layer w0.8: R12.2@312.509,65.456 312.509,63.215 313.959,61.765 Q2.3@314.39,61.765
NetQ3_3: Q3.3 R23.2 | length 4.1
  Bottom Layer w0.8: R23.2 359.41,62.763 360.03,62.144 360.03,61.949 360.435,61.544 Q3.3
NetQ4_3: Q4.3 R24.2 | length 5.5
  Bottom Layer w0.8: R24.2@288.293,65.382 288.293,62.111 288.895,61.509 290.007,61.509 Q4.3@290.175,61.341
NetQ5_3: Q5.3 R35.2 | length 4.5
  Bottom Layer w0.8: R35.2 336.737,65.002 336.737,63.118 338.26,61.595 Q5.3
NetQ6_3: Q6.3 R36.2 | length 5.8
  Bottom Layer w0.8: 264.135,63.403 264.135,62.104 264.603,61.636 266.036,61.636 Q6.3@266.204,61.468 ; 264.135,63.404 264.135,65.269 R36.2@264.323,65.456
NetR9_2: R9.2 U1.1 | length 6.3
  Bottom Layer w0.8: U1.1 389.255,73.409 389.617,73.771 389.998,73.771 390.172,73.945 R9.2
NetR10_2: R10.2 U2.1 | length 6.9
  Bottom Layer w0.8: U2.1 320.04,74.041 320.402,74.403 320.783,74.403 320.957,74.577 R10.2
NetR11_1: R11.1 U1.3 | length 10.6
  Bottom Layer w0.8: R11.1 381.635,70.869 386.715,65.789 U1.3
NetR12_1: R12.1 U2.3 | length 11.6
  Bottom Layer w0.8: R12.1 312.369,74.32 312.369,69.24 315.646,65.964 317.166,65.964 317.242,66.04 U2.3
NetR21_2: R21.2 U3.1 | length 5.7
  Bottom Layer w0.8: U3.1 367.665,73.409 368.027,73.771 368.408,73.771 368.582,73.945 R21.2
NetR22_2: R22.2 U4.1 | length 5.2
  Bottom Layer w0.8: U4.1 296.907,73.387 296.907,73.826 297.376,74.295 R22.2
NetR23_1: R23.1 U3.3 | length 12.5
  Bottom Layer w0.8: R23.1 359.41,68.345 362.347,65.408 U3.3
NetR24_1: R24.1 U4.3 | length 11.2
  Bottom Layer w0.8: R24.1@288.293,74.272 288.315,74.249 288.315,72.365 293.866,66.814 293.866,65.544 U4.3
NetR33_2: R33.2 U5.1 | length 5.7
  Bottom Layer w0.8: U5.1 344.805,73.559 345.167,73.921 345.548,73.921 345.722,74.095 R33.2
NetR34_2: R34.2 U6.1 | length 6.3
  Bottom Layer w0.8: U6.1 272.415,73.759 272.777,74.121 273.158,74.121 273.332,74.295 R34.2
NetR35_1: R35.1 U5.3 | length 12.5
  Bottom Layer w0.8: R35.1 336.55,68.427 339.419,65.558 341.931,65.558 341.931,65.476 U5.3@342.062,65.345
NetR36_1: R36.1 U6.3 | length 10.9
  Bottom Layer w0.8: R36.1@264.323,74.346 264.323,72.664 269.774,67.212 269.774,65.859 U6.3
OUT_1: R9.1 U7.11 | length 58.5
  Bottom Layer w0.8: U7.11 358.775,85.067 359.244,84.598 369.831,84.598 369.84,84.607 378.694,84.607 381.237,82.064 395.456,82.064 397.383,80.137 397.383,67.329 395.108,65.055 R9.1
OUT_2: R21.1 U7.10 | length 41.6
  Bottom Layer w0.8: U7.10 356.374,86.621 356.374,84.923 358.498,82.798 370.576,82.798 370.582,82.804 375.829,82.804 376.298,82.335 376.298,68.608 R21.1
OUT_3: R33.1 U7.9 | length 22.8
  Bottom Layer w0.8: R33.1@350.027,65.345 350.027,69.838 ; 350.027,69.992 353.695,73.66 U7.9
OUT_4: R10.1 U7.8 | length 37.7
  Bottom Layer w0.8: R10.1@326.339,65.684 326.526,65.872 326.526,67.345 332.74,73.558 332.74,76.225 337.513,80.998 348.282,80.998 351.016,83.732 351.016,86.621 U7.8
OUT_5: R22.1 U7.7 | length 62.7
  Bottom Layer w0.8: R22.1 300.99,70.908 315.421,85.339 329.193,85.339 331.734,82.798 346.276,82.798 348.476,84.999 348.476,86.621 U7.7
OUT_6: R34.1 U7.6 | length 80.9
  Bottom Layer w0.8: R34.1@277.984,65.524 278.169,65.709 278.169,67.396 286.399,75.625 286.399,75.629 294.767,83.998 311.534,83.998 314.675,87.139 329.938,87.139 332.479,84.598 345.53,84.598 345.999,85.067 345.999,86.684 U7.6
OUT_BTN_1: P3.8 R1.1 R3.1 R7.2 | length 61.2
  Bottom Layer w0.8: P3.8 368.478,140.335 371.475,137.338 R3.1 373.101,134.341 378.104,134.341 R1.1 R7.2
OUT_BTN_2: P3.7 R13.1 R15.1 R19.2 | length 46.3
  Bottom Layer w0.8: P3.7 323.85,138.154 324.319,137.685 348.725,137.685 R15.1 353.96,132.715 355.484,134.239 359.526,134.239 361.05,132.715 R19.2
OUT_BTN_3: P3.6 R25.1 R27.1 R30.2 | length 34.4
  Bottom Layer w0.8: P3.6 318.77,136.714 319.599,135.885 332.11,135.885 R27.1 336.677,134.112 342.138,134.112 R25.1 R30.2
OUT_BTN_4: P3.4 R2.1 R4.1 R8.2 | length 25.2
  Bottom Layer w0.8: P3.4 308.61,137.871 313.766,132.715 317.765,132.715 318.857,133.807 323.763,133.807 324.855,132.715 R8.2
OUT_BTN_5: P3.3 R14.1 R16.1 R20.2 | length 20.9
  Bottom Layer w0.8: R16.1 R16.1@299.802,132.797 ; P3.3 303.53,137.922 299.802,134.194 R16.1@299.802,132.797 ; R20.2 R14.1 306.146,133.909 300.914,133.909 R16.1@299.802,132.797
OUT_BTN_6: P3.2 R26.1 R28.1 R31.2 | length 22.2
  Bottom Layer w0.8: R28.1 281.952,132.703 289.548,132.703 R26.1 289.572,132.703 292.723,132.703 R31.2 294.869,134.849 297.301,134.849 298.45,135.997 P3.2
OUT_RL1: P2.4 RL1.1 | length 117.4
  Bottom Layer w1.5: P2.4 285.75,24.548 291.118,19.18 375.237,19.18 382.372,26.314 382.372,38.449 RL1.1
OUT_RL2: P2.3 RL3.1 | length 86.2
  Bottom Layer w1.5: P2.3 291.059,27.711 291.059,24.181 292.024,23.216 293.559,21.68 352.261,21.68 360.203,29.622 RL3.1
OUT_RL3: P2.2 RL5.1 | length 56.5
  Bottom Layer w1.5: P2.2 295.91,25.425 297.155,24.18 333.425,24.18 337.343,28.098 RL5.1
OUT_RL4: P2.6 RL2.1 | length 46.8
  Bottom Layer w1.5: P2.6 275.59,33.045 276.936,34.392 312.115,34.392 313.213,35.489 RL2.1
OUT_RL5: P2.7 RL4.1 | length 36.6
  Bottom Layer w1.5: P2.7 270.51,41.351 272.694,43.536 286.791,43.536 289.083,41.244 RL4.1
OUT_RL6: P2.8 RL6.1 | length 10.8
  Bottom Layer w0.8: RL6.1 265.192,38.266 265.192,28.178 P2.8
RX2: C19.3 U7.21 | length 100.9
  Bottom Layer w0.8: C19.3 278.572,112.979 280.784,115.192 290.7,115.192 301.854,104.038 341.794,104.038 345.245,107.489 353.776,107.489 356.096,109.81 356.096,111.621 U7.21
SCL: C18.1 U7.29 | length 81.2
  Bottom Layer w0.8: C18.1 270.561,131.851 281.534,120.879 295.224,120.879 306.505,109.598 334.271,109.598 335.776,111.104 335.776,111.621 U7.29
SDA: C18.2 U7.26 | length 89.2
  Bottom Layer w0.8: C18.2 270.535,129.311 281.026,118.821 294.259,118.821 305.282,107.798 340.091,107.798 343.396,111.104 343.396,111.621 U7.26
TX2: C19.2 U7.22 | length 97.2
  Bottom Layer w0.8: C19.2 265.198,115.567 278.279,115.567 279.704,116.992 292.913,116.992 303.907,105.998 340.836,105.998 344.185,109.347 353.088,109.347 353.556,109.816 353.556,111.621 U7.22
VCC5: B1.2 C2.1 C7.1 D1.2 D2.2 D3.2 D4.2 D5.2 D6.2 LED3.1 LED4.1 LED7.1 LED8.1 LED11.1 LED12.1 RL1.3 RL2.3 RL3.3 RL4.3 RL5.3 RL6.3 U1.4 U2.4 U3.4 U4.4 U5.4 U6.4 UN1.3 | length 396.9
  Top Layer w1: C2.1 v1(272.847,100.866) ; v1(284.585,79.118) 284.599,79.132 292.856,79.132 v1(292.87,79.145) ; v1(289.331,96.647) 289.344,96.634 289.344,89.471 v1(289.357,89.459) ; v1(305.562,79.223) 314.684,79.223 314.811,79.096 v1(314.884,79.096) ; v1(326.136,79.101) 328.471,79.101 328.729,78.843 v1(339.725,78.843) ; v1(348.258,78.843) 348.285,78.816 361.905,78.816 362.052,78.669 v1(362.125,78.669) ; v1(369.824,78.642) 369.857,78.609 381.304,78.609 381.435,78.74 v1(381.508,78.74)
  Bottom Layer w1: C2.1 272.942,95.777 275.078,95.777 276.049,96.749 289.039,96.749 289.089,96.699 289.28,96.699 v1(289.331,96.647) ; v1(272.847,100.866) 278.324,100.866 278.327,100.863 283.994,100.863 286.996,103.865 286.996,106.021 UN1.3 ; RL6.3@277.266,50.629 277.266,56.222 277.42,56.375 277.287,56.509 274.326,56.509 D6.2 274.32,59.69 272.415,61.595 U6.4 272.415,66.04 272.315,66.14 272.315,67.358 266.549,73.124 266.549,75.269 266.522,75.296 266.522,77.368 268.299,79.145 v1@284.534,79.145 ; v1(284.585,79.118) 284.558,79.145 v1@284.534,79.145 ; v1@292.745,79.171 292.745,79.223 v1(305.562,79.223) ; v1(292.87,79.145) 290.83,77.105 290.83,72.62 296.505,66.945 296.505,65.445 296.57,65.38 296.57,61.239 298.196,59.614 298.196,56.574 298.521,56.248 301.422,56.248 301.32,56.147 RL4.3@301.32,50.641 ; B1.2 297.719,94.519 296.246,94.519 291.262,89.535 C7.1 284.48,79.375 284.585,79.27 284.585,79.197 v1@284.534,79.145 ; U2.4@320.04,66.942 320,66.982 320,68.482 317.068,71.414 314.96,73.522 314.96,76.259 314.884,76.335 v1(314.884,79.096) 314.886,79.098 326.133,79.098 v1(326.136,79.101) ; U2.4@320.269,66.654 320.269,57.633 320.954,56.947 322.555,56.947 322.656,57.048 322.707,56.998 325.771,56.998 325.822,56.947 325.822,56.827 325.509,56.514 RL2.3@325.509,50.754 ; D5.2@346.253,56.863 349.436,56.863 LED11.1@349.606,56.693 ; D5.2@346.253,57.117 346.253,59.512 344.805,60.96 U5.4 344.705,65.658 344.705,67.158 339.725,72.138 v1(339.725,78.843) 339.725,78.867 348.234,78.867 v1(348.258,78.843) ; RL5.3@349.377,50.641 349.377,55.933 349.4,55.956 LED11.1@349.4,56.567 ; v1(369.824,78.642) 369.751,78.642 369.63,78.763 363.212,78.763 363.17,78.721 362.177,78.721 v1(362.125,78.669) 362.077,78.621 362.077,72.496 367.625,66.948 367.625,65.448 U3.4 367.665,61.849 369.316,60.198 369.316,57.404 D3.2 369.57,56.919 369.895,56.594 371.904,56.594 LED7.1 372.11,56.268 372.395,55.983 RL3.3 ; v1(381.508,78.74) 382.778,78.74 384.048,77.47 384.048,72.115 389.215,66.948 389.215,65.448 U1.4 389.255,61.473 391.503,59.225 391.503,57.053 391.516,57.04 391.516,56.921 391.841,56.596 394.792,56.596 394.792,56.476 394.479,56.163 RL1.3@394.479,50.398
VCC5_ISO: B1.4 C6.1 C16.3 C17.3 C18.3 C19.4 LED1.1 LED2.1 LED5.1 LED6.1 LED9.1 LED10.1 R1.2 R2.2 R13.2 R14.2 R25.2 R26.2 U7.15 | length 358.3
  Top Layer w1: v1(273.279,83.388) 273.305,83.415 290.022,83.415 290.224,83.617 v1(290.297,83.617) ; v1(303.352,131.826) 303.364,131.814 303.364,127.158 v1(303.377,127.145) ; v1(321.361,131.422) 321.412,131.372 v1(321.412,127.152) ; v1(336.334,91.58) 336.34,91.573 353.181,91.573 v1(353.187,91.567) ; v1(339.446,131.626) 339.471,131.6 v1(339.471,127.356) ; v1(357.539,131.472) 357.56,131.451 357.56,127.223 v1(357.581,127.202) ; v1(376.707,127.457) 376.733,127.483 376.733,132.029 v1(376.758,132.055)
  Bottom Layer w1: 262.508,97.242 262.508,96.215 ; 262.509,110.514 262.509,103.074 262.508,103.072 262.508,97.334 262.553,97.288 ; C16.3 262.584,96.291 262.508,96.215 ; C19.4 262.584,110.439 262.508,110.515 262.508,126.859 ; C18.3 265.063,126.859 262.508,126.859 ; v1(273.279,83.388) 273.253,83.363 267.362,83.363 265.634,85.09 265.43,85.09 265.343,85.177 264.224,85.177 262.508,86.894 262.508,96.215 ; v1(290.297,83.617) 296.215,89.535 B1.4 312.42,89.535 C6.1 314.333,91.448 314.8,91.448 314.944,91.592 336.321,91.592 v1(336.334,91.58) ; v1(303.377,127.145) 303.377,127.072 304.493,125.956 304.493,124.633 304.62,124.506 304.881,124.506 305.133,124.254 306.7,124.254 307.129,123.825 R14.2 ; v1(321.412,127.152) 321.412,127.079 322.501,125.99 322.501,124.666 LED2.1 324.274,124.46 324.909,123.825 R2.2 ; v1(339.471,127.356) 340.487,126.34 LED9.1 342.689,124.46 343.324,123.825 R25.2 ; v1(353.187,91.567) 353.31,91.567 353.312,91.568 357.781,91.568 357.832,91.619 369.616,91.619 370.918,90.318 370.918,88.698 368.979,86.76 U7.15 ; v1@357.539,131.446 357.565,131.42 359.231,131.42 360.325,130.326 372.465,130.326 374.193,132.055 v1(376.758,132.055) ; v1(357.539,131.472) 357.487,131.42 355.779,131.42 354.685,130.326 342.545,130.326 341.381,131.491 337.434,131.491 336.27,130.326 324.13,130.326 323.169,131.287 319.451,131.287 318.49,130.326 306.35,130.326 304.872,131.804 304.566,131.804 304.529,131.841 303.352,131.841 303.286,131.774 302.158,131.774 300.71,130.326 298.73,130.326 298.602,130.454 298.38,130.454 297.227,131.608 295.007,131.608 293.7,130.302 290.423,130.302 289.56,129.438 R26.2 289.349,123.801 288.896,124.254 287.353,124.254 LED10.1 287.147,126.719 286.561,127.305 278.613,127.305 271.613,134.304 263.386,134.304 262.508,133.425 262.508,126.859 ; v1(357.581,127.202) 357.633,127.15 357.744,127.15 358.427,126.467 358.427,124.735 358.445,124.717 LED5.1 360.52,124.409 361.104,123.825 R13.2 ; v1(376.707,127.457) 376.682,127.432 LED1.1 376.805,124.337 379.007,124.337 379.519,123.825 R1.2
VCC33_ISO: C10.3 C11.3 C14.3 C15.3 U7.16 | length 76.2
  Top Layer w0.8: v1(380.505,118.224) 380.511,118.218 390.009,118.218 v1(390.015,118.212)
  Bottom Layer w0.8: U7.16 374.04,111.76 v1(380.505,118.224) ; v1(390.015,118.212) 390.028,118.224 394.703,118.224 C11.3 397.586,118.237 ; C15.3 394.906,93.574 397.586,96.253 397.586,106.147 ; C14.3 397.485,106.045 397.586,106.147 ; C10.3 394.826,130.319 397.118,130.319 399.059,128.377 399.059,122.944 397.586,121.471 397.586,118.237 ; 397.586,106.147 397.586,118.237
pads on no net: RL1.2 RL2.2 RL3.2 RL4.2 RL5.2 RL6.2 U7.1 U7.19 U7.27 U7.28 UN1.0
copper on no net:
  other v2: 257.835,19.71 395.529,21.107 311.099,117.246 258.369,146.812 397.002,146.863

## Keep-outs
Keep-Out Layer:
  lines w0.254: 400.812,35.077 400.812,148.006 400.886,150.647 254.508,150.647 254.457,150.597 254.457,148.082 254.457,16.485 254.508,16.434 400.812,16.434 ; 400.812,35.103 400.812,16.434 ; 400.863,16.485 400.812,16.434

## Other copper
Bottom Layer:
  text "Bùi Quốc Tuấn 2018605300" at 391.185,143.102 h5

## Text inside footprints (layer, text, board x,y; h text height)
U7: Top Overlay "VIN" at 369.675,89.135 h0.75 r180; Top Overlay "GND" at 367.375,89.135 h0.75 r180; Top Overlay "D13" at 364.675,89.135 h0.75 r180; Top Overlay "D12" at 362.075,89.135 h0.75 r180; Top Overlay "D14" at 359.475,89.135 h0.75 r180; Top Overlay "D27" at 357.075,89.135 h0.75 r180; Top Overlay "D26" at 354.675,89.135 h0.75 r180; Top Overlay "D25" at 352.075,89.135 h0.75 r180; Top Overlay "D33" at 349.575,89.135 h0.75 r180; Top Overlay "D32" at 347.075,89.135 h0.75 r180; Top Overlay "D35" at 344.375,89.135 h0.75 r180; Top Overlay "D34" at 341.875,89.135 h0.75 r180; Top Overlay "VN" at 339.175,89.135 h0.75 r180; Top Overlay "VP" at 336.375,89.135 h0.75 r180; Top Overlay "EN" at 333.875,89.135 h0.75 r180; Top Overlay "3V3" at 369.875,110.635 h0.75 r180; Top Overlay "GND" at 367.375,110.635 h0.75 r180; Top Overlay "D15" at 364.875,110.635 h0.75 r180; Top Overlay "D2" at 361.875,110.635 h0.75 r180; Top Overlay "D4" at 359.375,110.635 h0.75 r180; Top Overlay "RX2" at 357.375,110.635 h0.75 r180; Top Overlay "TX2" at 354.875,110.635 h0.75 r180; Top Overlay "D5" at 351.675,110.635 h0.75 r180; Top Overlay "D18" at 349.375,110.635 h0.75 r180; Top Overlay "D19" at 346.875,110.635 h0.75 r180; Top Overlay "D21" at 344.375,110.635 h0.75 r180; Top Overlay "RX0" at 341.875,110.635 h0.75 r180; Top Overlay "TX0" at 339.375,110.635 h0.75 r180; Top Overlay "D22" at 336.875,110.635 h0.75 r180; Top Overlay "D23" at 334.375,110.635 h0.75 r180